# Altium PCB FPGA扩展板.PcbDoc
Units mil, origin at the board's own origin, x right, y up, seen from the top; angles counter-clockwise.
Board outline 2600 x 1377.95 mil, 2 copper layers (Top Layer, Bottom Layer); 12 components, 41 nets, 118 pads, 27 vias.
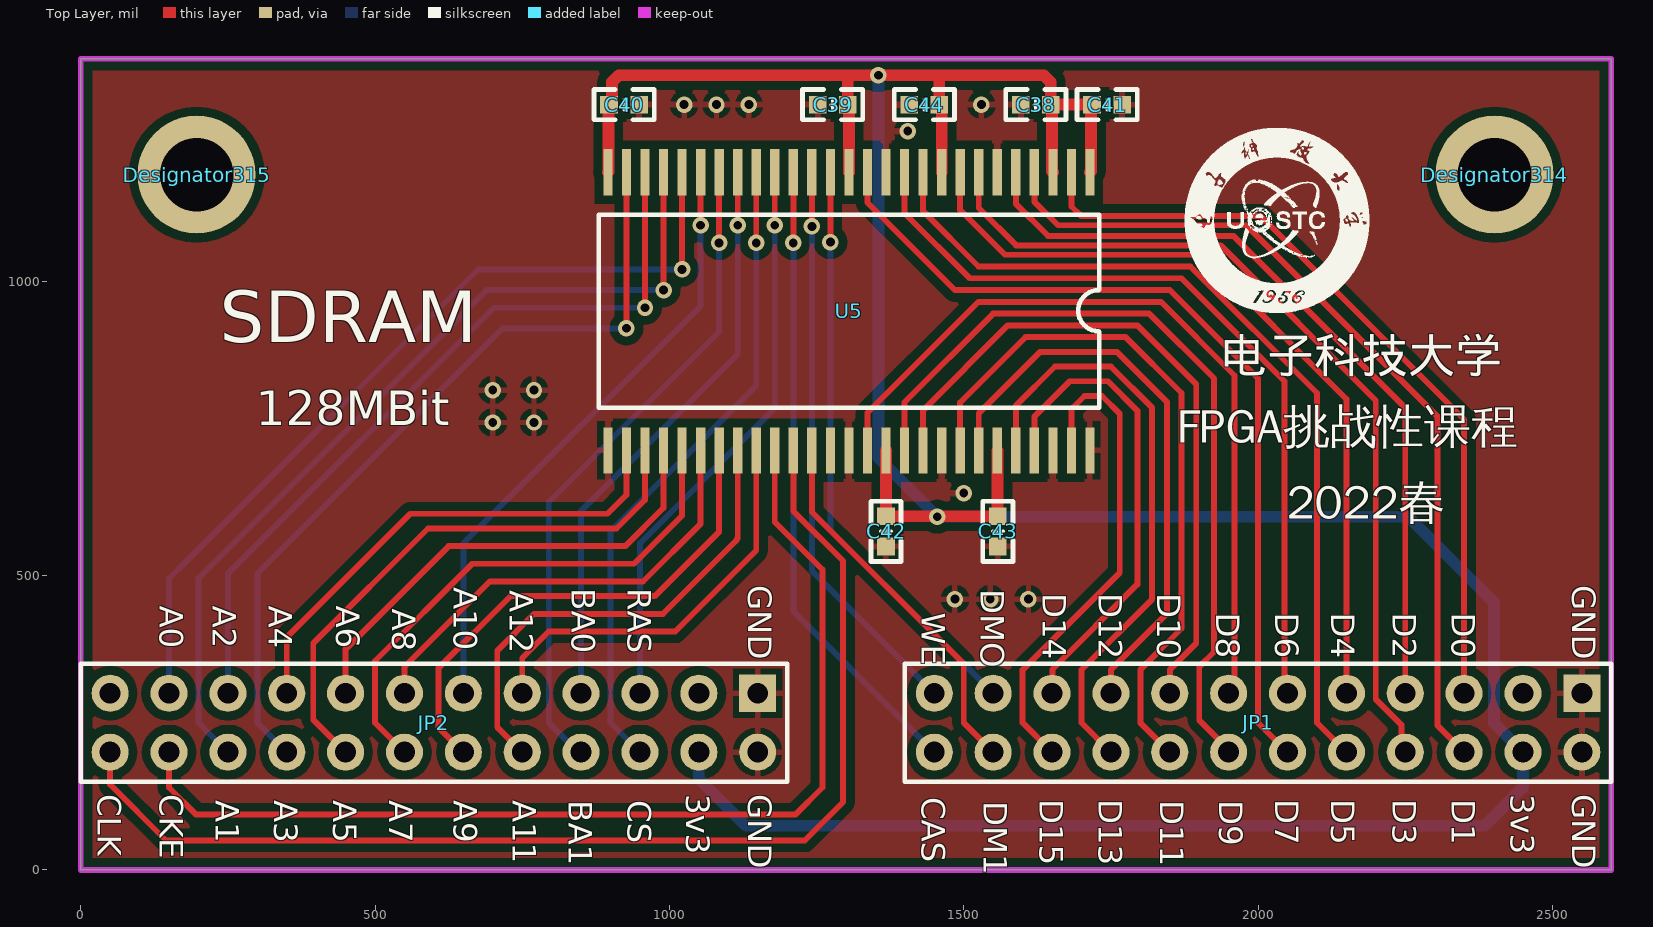
[diagram p0: Top Layer view]
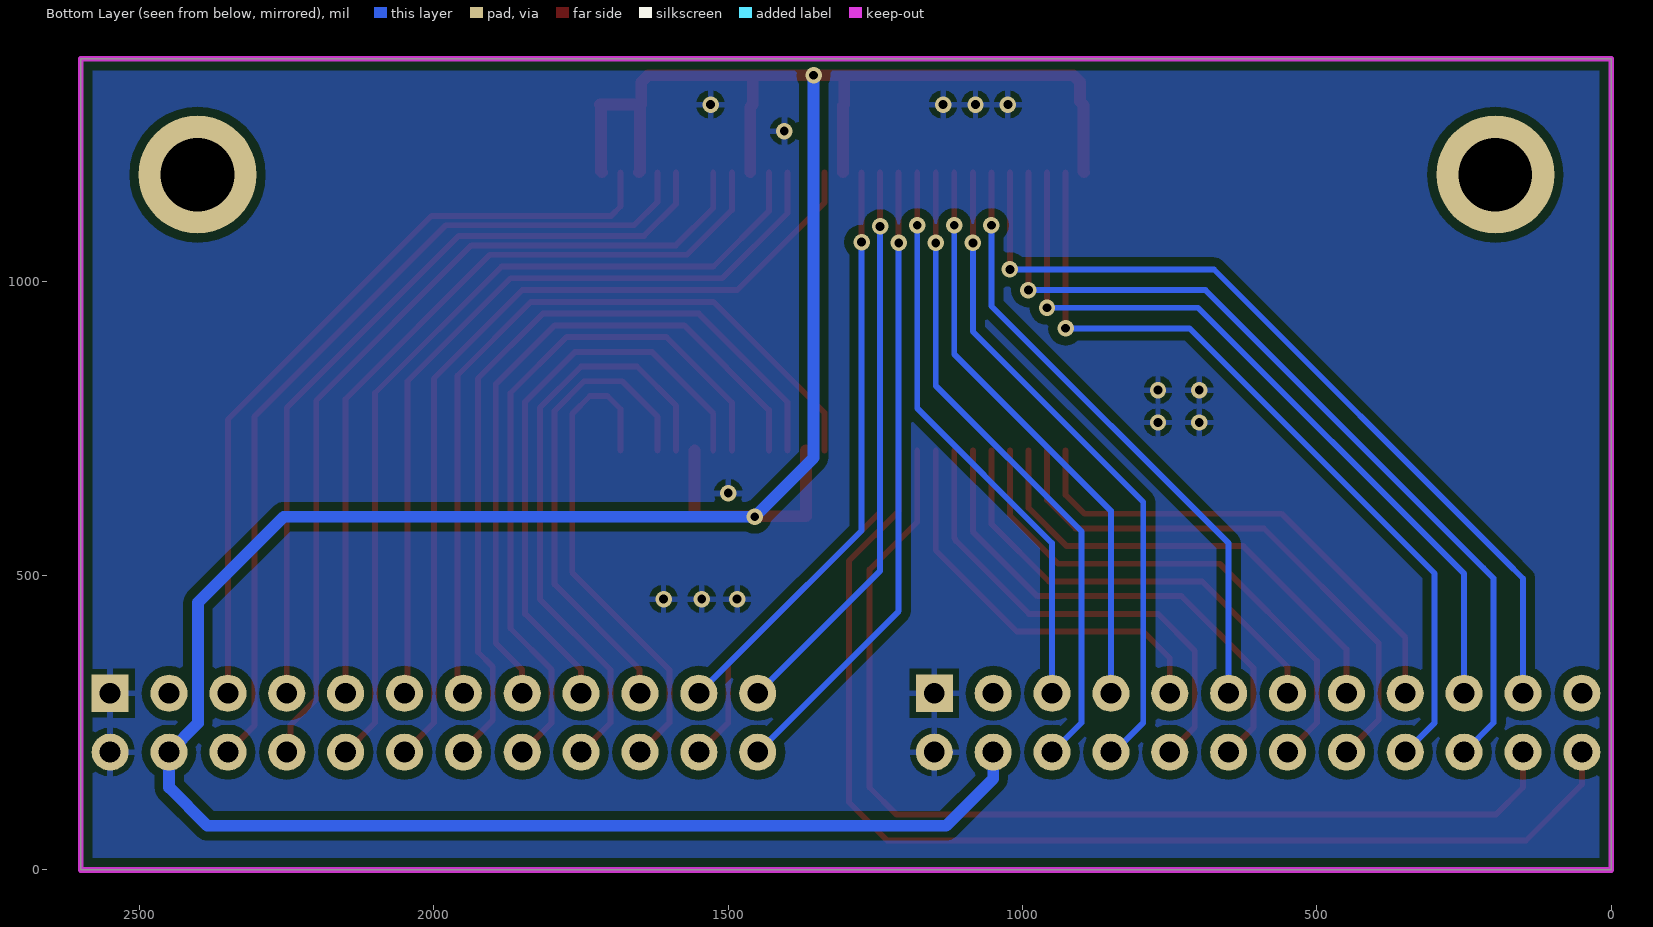
[diagram p1: Bottom Layer view, seen from below]

## Layer stack, top to bottom
Top Solder: solder mask 0.4, Solder Resist, Dk 3.5
Top Layer: signal copper 1.4
Dielectric 1: dielectric 12.6, FR-4, Dk 4.8
Bottom Layer: signal copper 1.4
Bottom Solder: solder mask 0.4, Solder Resist, Dk 3.5

## Board outline
0,0 0,1377.95 2600,1377.95 2600,0

## Design rules (kind name [scope] priority, off if disabled: settings)
Clearance [All] p1: gap=6 ignorepadtopadclearanceinfootprint=TRUE except(0: Arc-Hole Track-Hole SMDPad-Hole THPad-Hole Via-Hole Fill-Hole Poly-Hole Region-Hole Text-Hole; 15: Arc-Fill Arc-Poly Arc-Region Track-Fill Track-Poly Track-Region SMDPad-Fill SMDPad-Poly SMDPad-Region THPad-Fill THPad-Poly THPad-Region Via-Fill Via-Poly Via-Region Fill-Fill Fill-Poly Fill-Region Poly-Poly Poly-Region Region-Region)
DiffPairsRouting [All] p1: maxlimit=10 minlimit=10 mostfreqgap=10 toplayer_minwidth=10 toplayer_maxwidth=15 toplayer_prefwidth=15 bottomlayer_minwidth=10 bottomlayer_maxwidth=15 bottomlayer_prefwidth=15 maxuncoupledlength=500
HoleSize [All] p1: absolutevalues=TRUE maxlimit=300 minlimit=1 maxpercent=80.000 minpercent=20.000
MinimumSolderMaskSliver [All] p1: minsoldermaskwidth=5
PolygonConnect [All] p1: connectstyle=Relief reliefconductorwidth=10 reliefentries=4 polygonreliefangle="90 Angle" airgapwidth=10
RoutingVias [All] p1: holewidth=28 width=50 viastyle="Through Hole" minholewidth=15 minwidth=28 maxholewidth=300 maxwidth=500
SilkToSolderMaskClearance [IsPad] p1: minsilkscreentomaskgap=0 clearancetoexposedcopper=TRUE
SolderMaskExpansion [All] p1: expansion=4 istentingtop=FALSE
Width [All] p1: maxlimit=100 minlimit=6 preferedwidth=10
26 further rules are at their usual default settings.

## Classes and differential pairs
component class FPGA扩展板: C38 C39 C40 C41 C42 C43 C44 JP1 JP2 U5

## Components (designator, comment, footprint, x,y, rotation, side; value= is the part's Value field where it differs from the comment)
C38 "104" "C 0603_L" 1622.4,1300 r0 top
C39 "104" "C 0603_L" 1277.4,1300 r0 top
C40 "104" "C 0603_L" 922.99,1300 r180 top
C41 "104" "C 0603_L" 1743.58,1300 r180 top
C42 "104" "C 0603_L" 1367.99,575 r90 top
C43 "104" "C 0603_L" 1557.99,575 r90 top
C44 "104" "C 0603_L" 1432.99,1300 r0 top
Designator314 "Comment" "M3 125X200" 2401.57,1181.1 r0 top
Designator315 "Comment" "M3 125X200" 196.85,1181.1 r0 top
JP1 "Header 2X11" HDR2.54-LI-2x12P 2000,250 r180 top
JP2 "Header 2X11" HDR2.54-LI-2x12P 600,250 r180 top
U5 "W9825G6KH-6" TSOP54 1714.45,1185 r270 top

## Footprints (in the part's own frame and the unit in brackets; to place one, negate y for a bottom-side part, rotate by r counter-clockwise, add the part's x,y. Pads: shape width x height; smd on the part's side, far side on the other; paste and mask are expansions set on the pad)
"C 0603_L" [mil] "无极性贴片电容                                       淘宝ID:黄晶宝石"
  rect 30x30 smd: 1(-25.59,0) 2(25.59,0)
  silkscreen extent -51,-26 51,26, body extent -31,-16 31,16, height 32
HDR2.54-LI-2x12P [mm] "双排排针，12x2脚   淘宝ID:黄晶宝石   店铺网址:https://shop463601444.taobao.com"
  rect 1.6x1.6 hole 0.9: 1(-13.97,-1.27)
  round 1.6 hole 0.9: 2(-13.97,1.27) 3(-11.43,-1.27) 4(-11.43,1.27) 5(-8.89,-1.27) 6(-8.89,1.27) 7(-6.35,-1.27) 8(-6.35,1.27) 9(-3.81,-1.27) 10(-3.81,1.27) 11(-1.27,-1.27) 12(-1.27,1.27) 13(1.27,-1.27) 14(1.27,1.27) 15(3.81,-1.27) 16(3.81,1.27) 17(6.35,-1.27) 18(6.35,1.27) 19(8.89,-1.27) 20(8.89,1.27) 21(11.43,-1.27) 22(11.43,1.27) 23(13.97,-1.27) 24(13.97,1.27)
  silkscreen extent -15.24,-2.54 15.24,2.54, body extent -15.24,-2.54 15.24,2.54, height 8.5
"M3 125X200" [mil] "M3螺丝孔，孔125Mil，焊盘200Mil"
  round 200 hole 125: 1(0,0)
TSOP54 [mm]
  rect 2x0.4 smd: 1(0,0) 2(0,-0.8) 3(0,-1.6) 4(0,-2.4) 5(0,-3.2) 6(0,-4) 7(0,-4.8) 8(0,-5.6) 9(0,-6.4) 10(0,-7.2) 11(0,-8) 12(0,-8.8) 13(0,-9.6) 14(0,-10.4) 15(0,-11.2) 16(0,-12) 17(0,-12.8) 18(0,-13.6) 19(0,-14.4) 20(0,-15.2) 21(0,-16) 22(0,-16.8) 23(0,-17.6) 24(0,-18.4) 25(0,-19.2) 26(0,-20) 27(0,-20.8) 28(12,-20.8) 29(12,-20) 30(12,-19.2) 31(12,-18.4) 32(12,-17.6) 33(12,-16.8) 34(12,-16) 35(12,-15.2) 36(12,-14.4) 37(12,-13.6) 38(12,-12.8) 39(12,-12) 40(12,-11.2) 41(12,-10.4) 42(12,-9.6) 43(12,-8.8) 44(12,-8) 45(12,-7.2) 46(12,-6.4) 47(12,-5.6) 48(12,-4.8) 49(12,-4) 50(12,-3.2) 51(12,-2.4) 52(12,-1.6) 53(12,-0.8) 54(12,0)
  silkscreen extent 1.84,-21.2 10.16,0.4

## Part data
C38 C39 C40 C41 C42 C43 C44: library part C, "贴片电容", BOM名称=无极性贴片电容, 联系售后=https://shop463601444.taobao.com, 淘宝ID="封装库来自淘宝 ID：黄晶宝石"
JP1 JP2: library part "Header 12X2", "12*2P接插件", BOM名称=12*2P接插件, 版权归属=源创客, 学习资源=www.ooocke.com
U5: library part IS42S16160B, "32MB SDRAM"

## Via types
v1: diameter 28, hole 15, Top Layer to Bottom Layer, tented both sides, 27 vias

## Nets (pads, with @x,y where several pads share a name; then routed paths per layer and width w, separated by ;. In a path a pad name is that pad's centre, name@x,y a point inside that pad or via, vN(x,y) a via of type N, cw(c..) or ccw(c..) an arc to the next point about the centre after c; other vN are vias at no path point)
A0: JP2.21 U5.23 | length 1449
  Top Layer w10: v1(1021.54,1020) U5.23
  Bottom Layer w10: JP2.21 150,495 180,525 675,1020 v1(1021.54,1020)
A1: JP2.20 U5.24 | length 1509
  Top Layer w10: v1(990.04,985) U5.24
  Bottom Layer w10: JP2.20 200,250 200,495.5 217.25,512.75 689.5,985 v1(990.04,985)
A2: JP2.19 U5.25 | length 1328.8
  Top Layer w10: v1(958.54,955) U5.25
  Bottom Layer w10: JP2.19 250,503.08 701.92,955 v1(958.54,955)
A3: JP2.18 U5.26 | length 1388.8
  Top Layer w10: v1(927.05,920) U5.26
  Bottom Layer w10: JP2.18 300,250 300,503.58 303.21,506.79 716.42,920 v1(927.05,920)
A4: JP2.17 U5.29 | length 847.8
  Top Layer w10: JP2.17 350,395 560,605 895,605 927.05,637.05 U5.29
A5: JP2.16 U5.30 | length 956.2
  Top Layer w10: JP2.16 395,255 395,385 590,580 910,580 958.54,628.54 U5.30
A6: JP2.15 U5.31 | length 812
  Top Layer w10: JP2.15 450,375 625,550 925,550 990.04,615.04 U5.31
A7: JP2.14 U5.32 | length 910.4
  Top Layer w10: JP2.14 500,250 500,355 665,520 940,520 1021.54,601.54 U5.32
A8: JP2.13 U5.33 | length 773.2
  Top Layer w10: JP2.13 550,345 695,490 955,490 1053.03,588.03 U5.33
A9: JP2.12 U5.34 | length 871.3
  Top Layer w10: JP2.12 607.5,242.5 607.5,342.5 730,465 975,465 1084.53,574.53 U5.34
A10: JP2.11 U5.22 | length 1051.9
  Top Layer w10: v1(1053.03,1095) U5.22
  Bottom Layer w10: JP2.11 650,555 1053.03,958.03 v1(1053.03,1095)
A11: JP2.10 U5.35 | length 827.3
  Top Layer w10: JP2.10 707.5,242.5 707.5,372.5 770,435 989.13,435 1113.09,558.97 ccw(c1106.02,566.04) 1116.02,566.04 U5.35
A12: JP2.9 U5.36 | length 703.2
  Top Layer w10: JP2.9 750,360 795,405 1010,405 1147.52,542.52 U5.36
BA0: JP2.7 U5.20 | length 995.2
  Top Layer w10: v1(1116.02,1095) U5.20
  Bottom Layer w10: JP2.7 850,610 1116.02,876.02 v1(1116.02,1095)
BA1: JP2.8 U5.21 | length 1130.6
  Top Layer w10: v1(1084.53,1065) U5.21
  Bottom Layer w10: JP2.8 845,200 795,250 795,625 1084.53,914.53 v1(1084.53,1065)
CAS: JP1.24 U5.17 | length 1084.2
  Top Layer w10: v1(1210.51,1065) U5.17
  Bottom Layer w10: v1(1210.51,1065) 1210.51,439.49 JP1.24
CKE: JP2.22 U5.37 | length 1814.3
  Top Layer w10: JP2.22 150,140 196.11,93.89 1213.89,93.89 1260,140 1260,510 1179.02,590.98 U5.37
CLK: JP2.24 U5.38 | length 1998.8
  Top Layer w10: JP2.24 50,145 145,50 1230,50 1295,115 1295,525 1210.51,609.49 U5.38
CS: JP2.6 U5.19 | length 1108.2
  Top Layer w10: v1(1147.52,1065) U5.19
  Bottom Layer w10: JP2.6 900,250 900,575 1147.52,822.52 v1(1147.52,1065)
D0: JP1.5 U5.2 | length 1340
  Top Layer w10: U5.2 1682.95,1127.05 1699,1111 2004,1111 2350,765 JP1.5
D1: JP1.6 U5.4 | length 1474.8
  Top Layer w10: U5.4 1619.96,1135.04 1660,1095 1980,1095 2305,770 2305,245 JP1.6
D2: JP1.7 U5.5 | length 1343.5
  Top Layer w10: U5.5 1588.46,1131.54 1643,1077 1958,1077 2250,785 JP1.7
D3: JP1.8 U5.7 | length 1488.6
  Top Layer w10: U5.7 1525.47,1124.53 1589,1061 1936.37,1061 2200,797.37 2200,289.9 2243.41,246.5 2243.41,206.59 JP1.8
D4: JP1.9 U5.8 | length 1353
  Top Layer w10: U5.8 1493.98,1121.02 1570,1045 1905,1045 2150,800 JP1.9
D5: JP1.10 U5.10 | length 1493.7
  Top Layer w10: U5.10 1430.98,1119.02 1525,1025 1885,1025 2100,810 2100,250 JP1.10
D6: JP1.11 U5.11 | length 1365.3
  Top Layer w10: U5.11 1399.49,1115.51 1510,1005 1870,1005 2045,830 2045,305 JP1.11
D7: JP1.12 U5.13 | length 1494.4
  Top Layer w10: U5.13 1336.5,1133.5 1485,985 1850,985 2000,835 2000,250 JP1.12
D8: JP1.13 U5.42 | length 1361.4
  Top Layer w10: U5.42 1336.5,776.5 1525,965 1835,965 1960,840 1960,310 JP1.13
D9: JP1.14 U5.44 | length 1381.4
  Top Layer w10: U5.44 1399.49,794.49 1550,945 1815,945 1925,835 1925,370 1900,345 1900,254.14 1950,204.14 JP1.14
D10: JP1.15 U5.45 | length 1177.2
  Top Layer w10: U5.45 1430.98,780.98 1575,925 1795,925 1895,825 1895,385 1850.64,340.64 1850.64,300.64 JP1.15
D11: JP1.16 U5.47 | length 1202.5
  Top Layer w10: U5.47 1493.98,793.98 1605,905 1775,905 1870,810 1870,410 1800,340 1800,250 JP1.16
D12: JP1.17 U5.48 | length 995.3
  Top Layer w10: U5.48 1525.47,775.47 1630,880 1760,880 1845,795 1845,435 1750,340 JP1.17
D13: JP1.18 U5.50 | length 1019.4
  Top Layer w10: U5.50 1588.46,788.46 1655,855 1750,855 1820,785 1820,460 1700,340 1700,250 JP1.18
D14: JP1.19 U5.51 | length 818.1
  Top Layer w10: U5.51 1619.96,769.96 1680,830 1745,830 1795,780 1795,485 1650.64,340.64 1650.64,300.64 JP1.19
D15: JP1.20 U5.53 | length 838.1
  Top Layer w10: JP1.20 1600,250 1600,340 1765,505 1765,775 1735,805 1705,805 1682.95,782.95 U5.53
DQM0: JP1.21 U5.15 | length 999.5
  Top Layer w10: v1(1273.5,1066.5) U5.15
  Bottom Layer w10: v1(1273.5,1066.5) 1273.5,576.5 1455,395 JP1.21
DQM1: JP1.22 U5.39 | length 640.1
  Top Layer w10: U5.39 1242.01,607.99 1500,350 1500,250 JP1.22
RAS: JP2.5 U5.18 | length 979.9
  Top Layer w10: v1(1179.02,1095) U5.18
  Bottom Layer w10: JP2.5 950,555 1179.02,784.02 v1(1179.02,1095)
SDGND: C38.1 C39.1 C40.1 C41.1 C42.1 C43.1 C44.1 JP1.1 JP1.2 JP2.1 JP2.2 U5.6 U5.12 U5.28 U5.41 U5.46 U5.52 U5.54
  other v1: 1485,460 1545,460 1610,460 1500,640 700,760 770,760 700,815 770,815 1405,1255 1025,1300 1080,1300 1135,1300 1530,1300
SDVCC3.3: C38.2 C39.2 C40.2 C41.2 C42.2 C43.2 C44.2 JP1.4 JP2.4 U5.1 U5.3 U5.9 U5.14 U5.27 U5.43 U5.49 | length 5641.3
  Top Layer w20: U5.27 896.48,1185.93 896.48,1299.07 902.4,1305 902.4,1338.28 914.12,1350 1310,1350 ; U5.14 1305,1297.99 C39.2 1302.99,1342.99 1310,1350 ; U5.43 C42.2 1556.97,600.59 1557.48,601.1 1557.48,712.05 U5.49 ; U5.9 1462.48,1296.1 C44.2 1458.58,1343.58 1465,1350 ; U5.3 1649.72,1186.73 1649.72,1298.27 C38.2 ; U5.1 1716.22,1186.77 1716.22,1298.23 C41.2 C38.2 ; 1310,1350 1465,1350 ; 1465,1350 1636.28,1350 1647.99,1338.28 C38.2
  Bottom Layer w20: JP2.4 1050,155 1130,75 2385,75 2450,140 JP1.4 2400.89,249.11 2400.89,454.11 2255,600 v1(1455,600) 1355,700 v1@1355,1350.09
  other v1: 1355,1350
WE: JP1.23 U5.16 | length 971.2
  Top Layer w10: v1(1242.01,1092.99) U5.16
  Bottom Layer w10: v1(1242.01,1092.99) 1242.01,507.99 JP1.23
pads on no net: Designator314.1 Designator315.1 JP1.3 JP2.3 JP2.23 U5.40

## Polygon pours and split planes (outlines as drawn)
SDGND on Bottom Layer "NONET_L01_P-001" (solid, remove dead copper, pour order 0): 0,1377.95 0,0 2600,0 2600,1377.95
SDGND on Top Layer "NONET_L01_P-001" (solid, remove dead copper, pour order 1): 0,1377.95 0,0 2600,0 2600,1377.95

## Keep-outs
Keep-Out Layer:
  the board outline again, w10

## Silkscreen, mask and mechanical layers (free items; w line width, h text height)
Top Overlay:
  drawing of 4457 lines, arcs and shapes, not listed
  text "SDRAM" at 236.26,867.15 h150
  text "电子科技大学" at 1935.4,826.18 h100
  text "128MBit" at 297.48,735.62 h100
  text "FPGA挑战性课程" at 1861.59,706.18 h100
  text "2022春" at 2048.57,576.55 h100
  text "GND" at 1134.01,483.32 h40 r270
  text "GND" at 2534.01,483.32 h40 r270
  text "A10" at 634.01,479.98 h40 r270
  text "BA0" at 834.01,478.32 h40 r270
  text "RAS" at 929.01,478.32 h40 r270
  text "DMO" at 1529.01,476.65 h40 r270
  text "A12" at 729.01,474.98 h40 r270
  text "D14" at 1634.01,469.98 h40 r270
  text "D12" at 1729.01,469.98 h40 r270
  text "D10" at 1829.01,469.98 h40 r270
  text "A0" at 134.01,448.32 h40 r270
  text "A2" at 224.01,448.32 h40 r270
  text "A4" at 319.01,448.32 h40 r270
  text "A6" at 434.01,448.32 h40 r270
  text "A8" at 529.01,443.32 h40 r270
  text "WE" at 1429.01,436.66 h40 r270
  text "D8" at 1929.01,436.66 h40 r270
  text "D6" at 2029.01,436.66 h40 r270
  text "D4" at 2124.01,436.66 h40 r270
  text "D2" at 2229.01,436.66 h40 r270
  text "D0" at 2329.01,436.66 h40 r270
  text "CLK" at 29.01,128.32 h40 r270
  text "CKE" at 134.01,128.32 h40 r270
  text "3v3" at 1029.01,128.32 h40 r270
  text "GND" at 1134.01,128.32 h40 r270
  text "3v3" at 2429.01,128.32 h40 r270
  text "GND" at 2534.01,128.32 h40 r270
  text "CAS" at 1429.01,123.32 h40 r270
  text "D15" at 1629.01,119.98 h40 r270
  text "D13" at 1729.01,119.98 h40 r270
  text "D7" at 2029.01,119.98 h40 r270
  text "D5" at 2124.01,119.98 h40 r270
  text "D3" at 2229.01,119.98 h40 r270
  text "D1" at 2329.01,119.98 h40 r270
  text "A1" at 229.01,118.32 h40 r270
  text "A3" at 329.01,118.32 h40 r270
  text "A5" at 429.01,118.32 h40 r270
  text "A7" at 524.01,118.32 h40 r270
  text "A9" at 634.01,118.32 h40 r270
  text "A11" at 734.01,118.32 h40 r270
  text "BA1" at 829.01,118.32 h40 r270
  text "CS" at 929.01,118.32 h40 r270
  text "D11" at 1834.01,118.32 h40 r270
  text "D9" at 1934.01,118.32 h40 r270
  text "DM1" at 1534.01,116.65 h40 r270